# Altium PCB VINYL-Player.PcbDoc
Units mm, origin at the board's own origin, x right, y up, seen from the top; angles counter-clockwise.
Board outline 152.4 x 101.6 mm, 18 copper layers (F.Cu, F.Mask, B.Cu, B.Mask, F.SilkS, B.SilkS, F.Adhes, B.Adhes, F.Paste, B.Paste, Dwgs.User, Cmts.User, Eco1.User, Eco2.User, Edge.Cuts, Margin, B.CrtYd, F.CrtYd); 26 components, 0 nets, 136 pads, 10 vias.
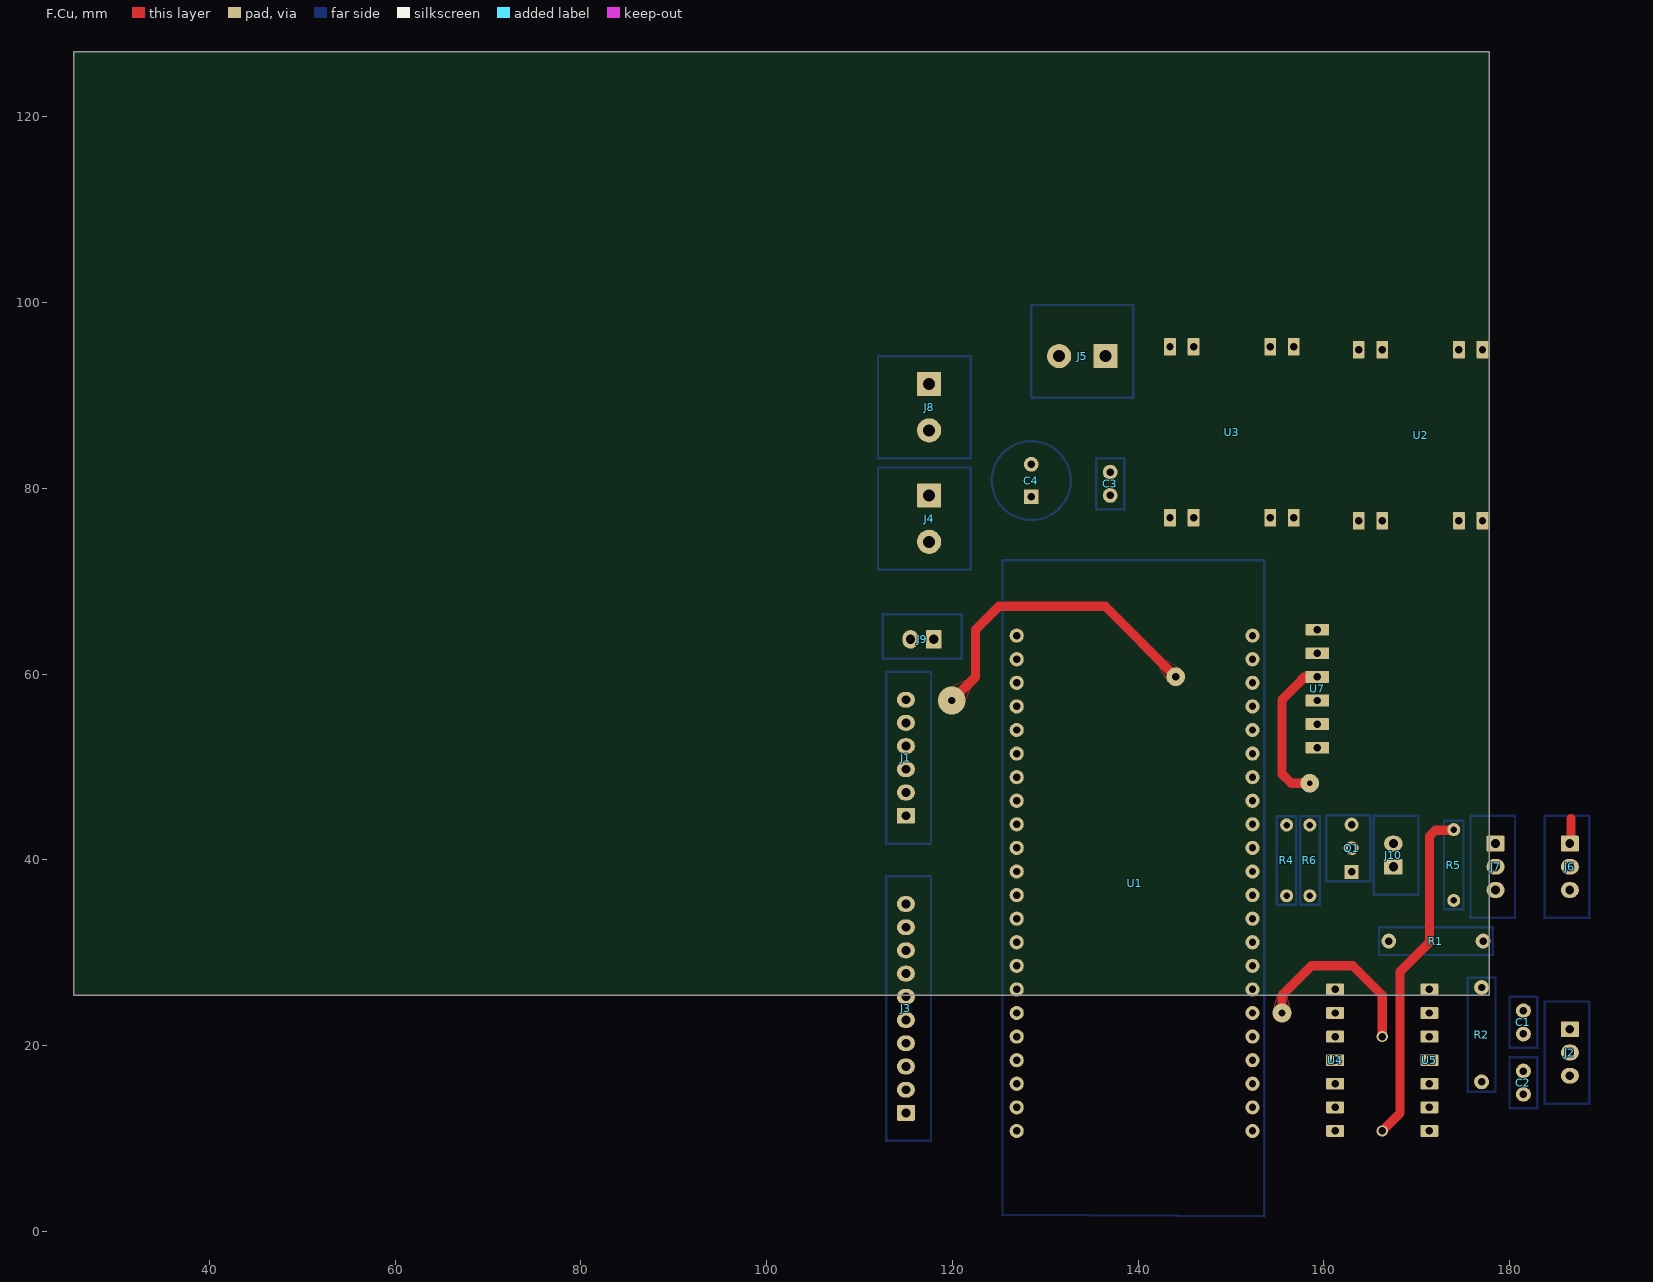
[diagram p0: F.Cu view]
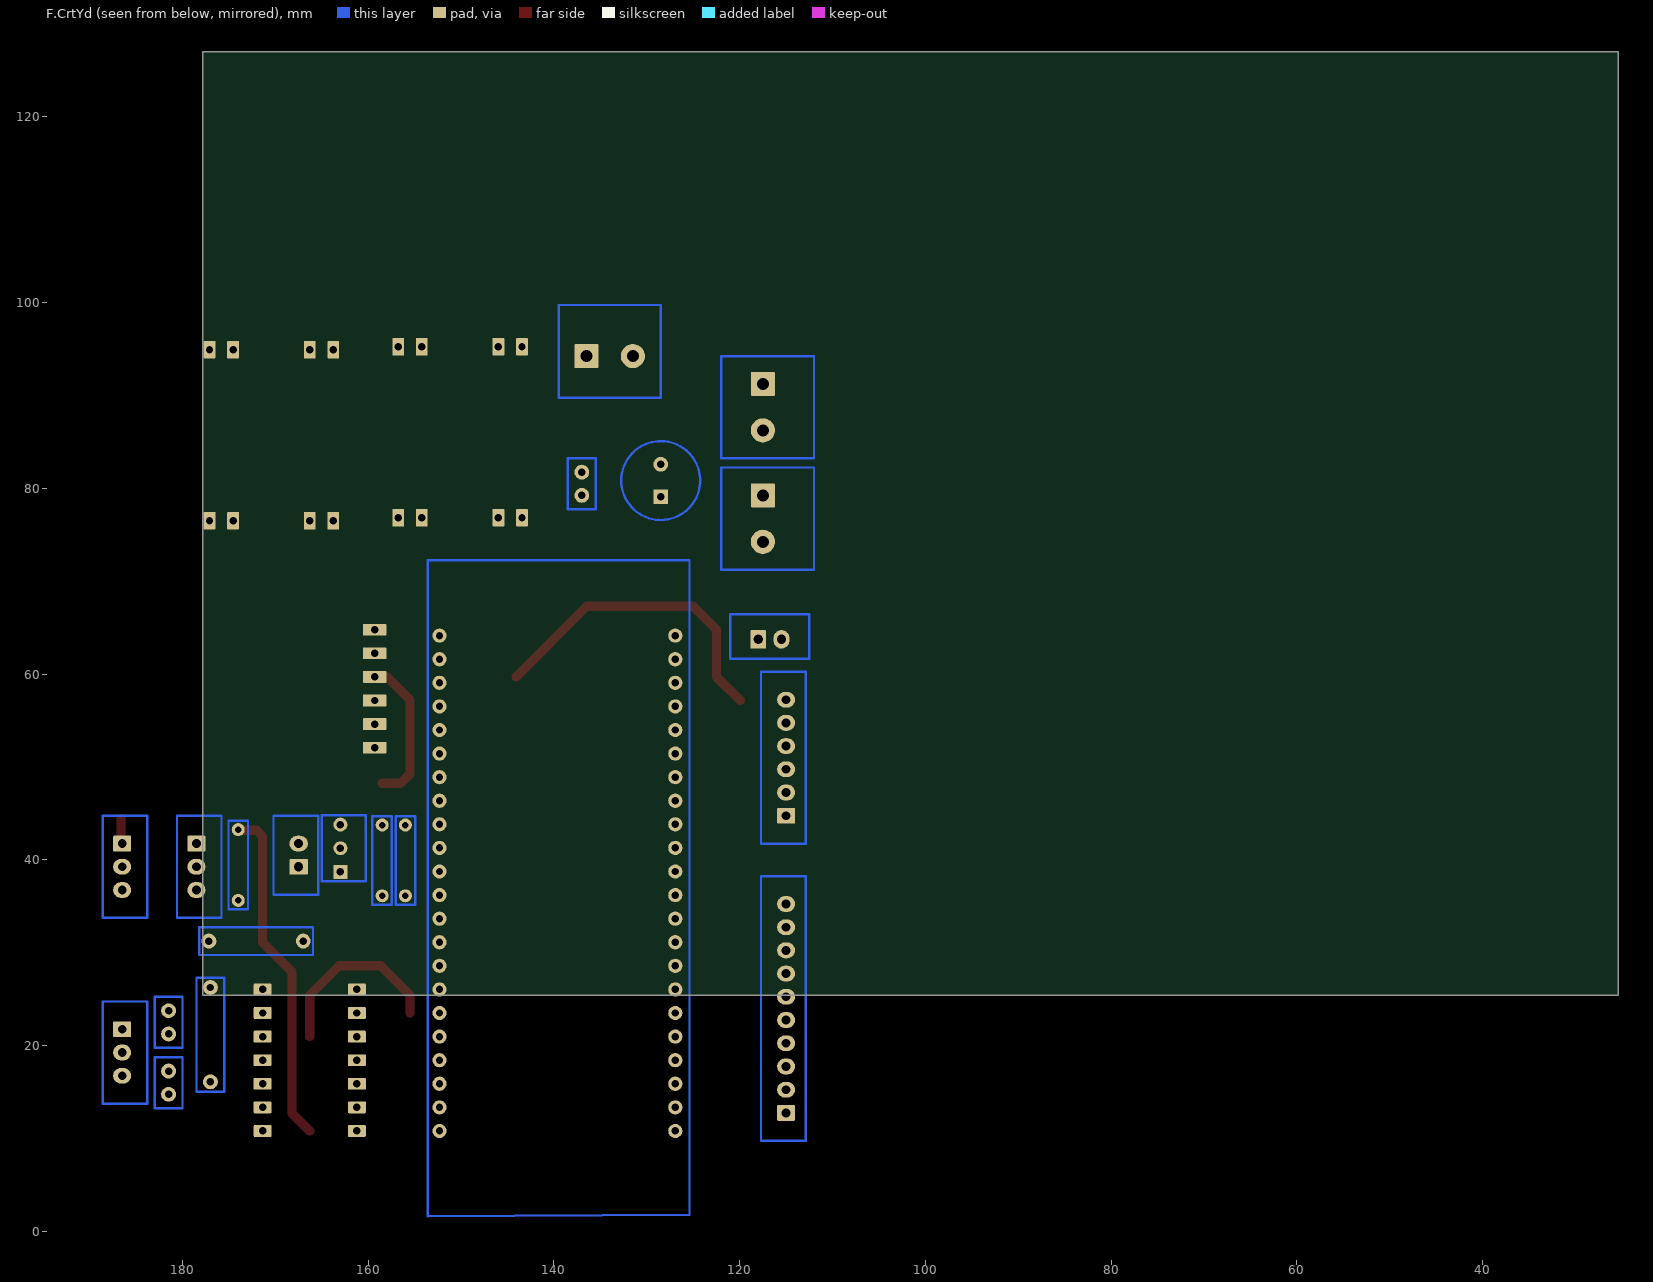
[diagram p1: F.CrtYd view, seen from below]
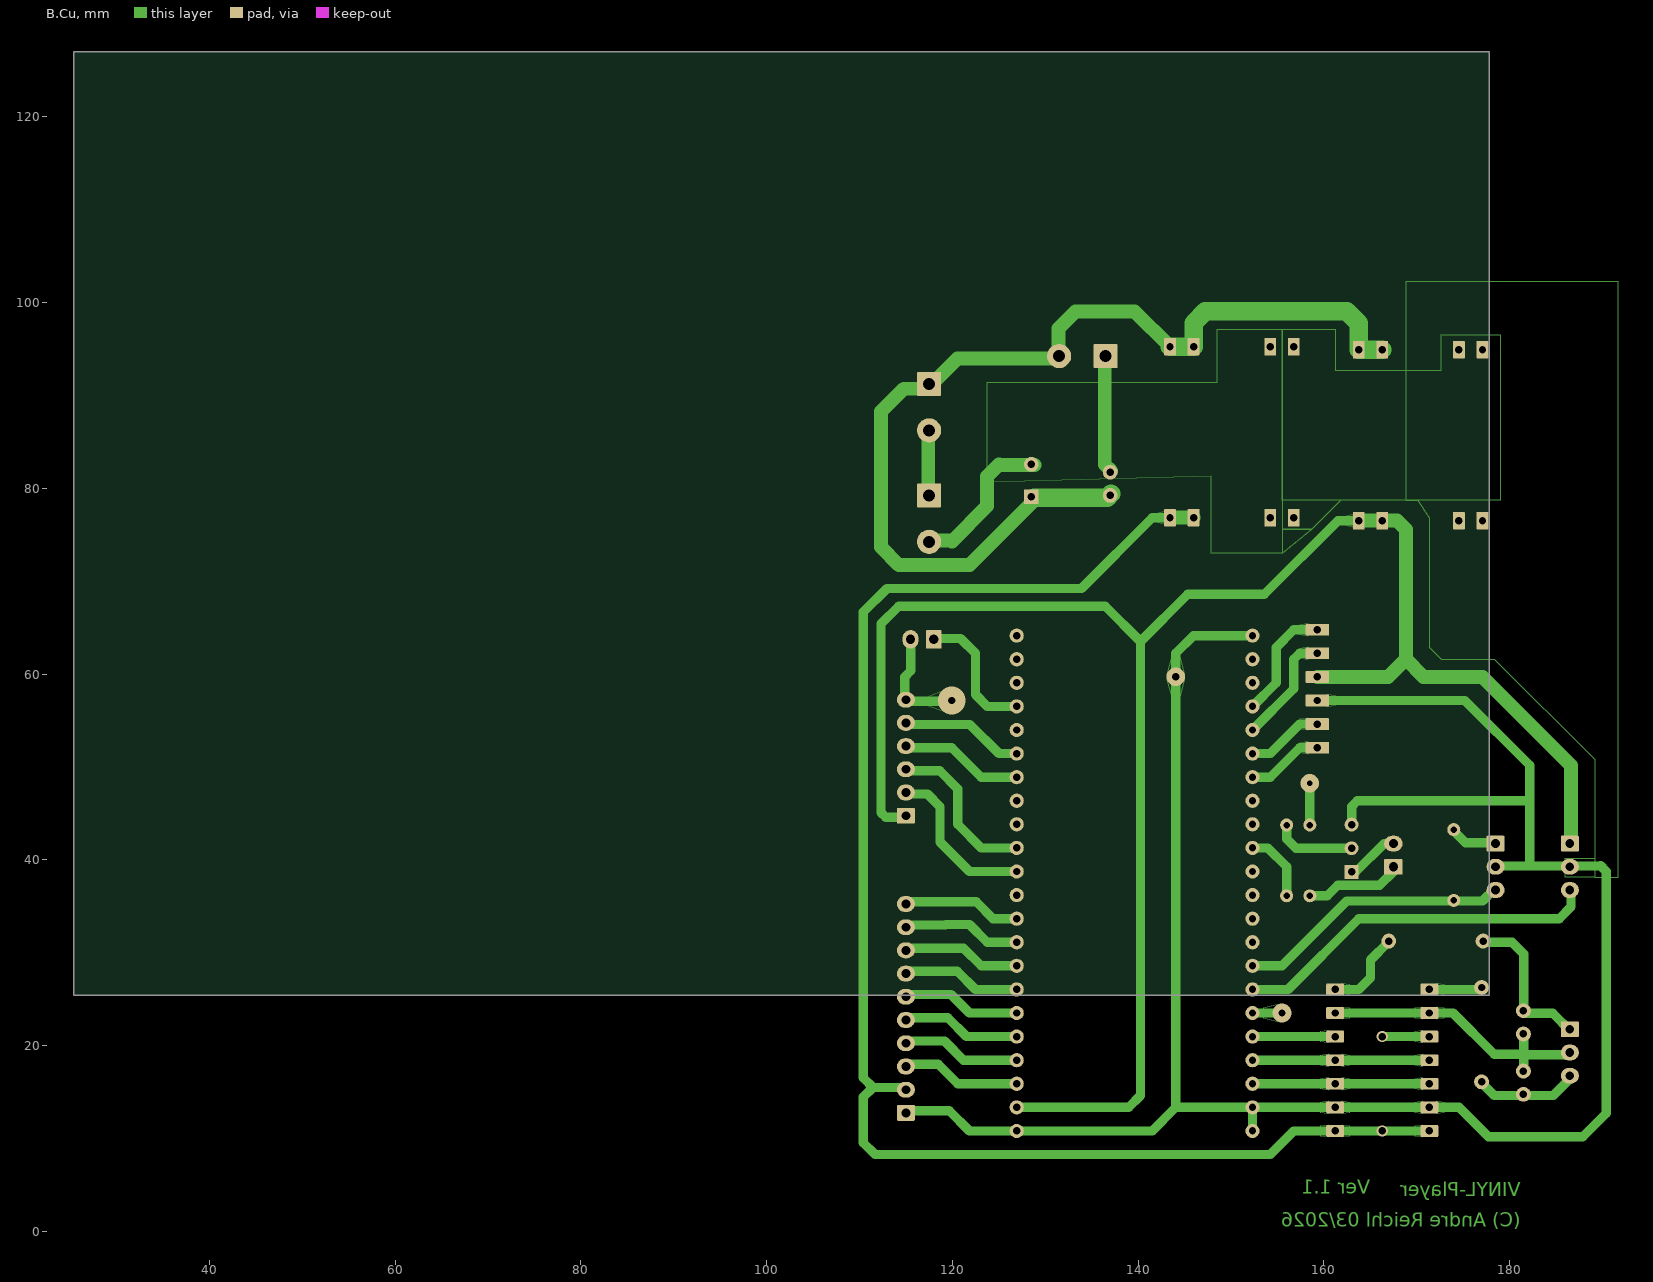
[diagram p2: B.Cu]
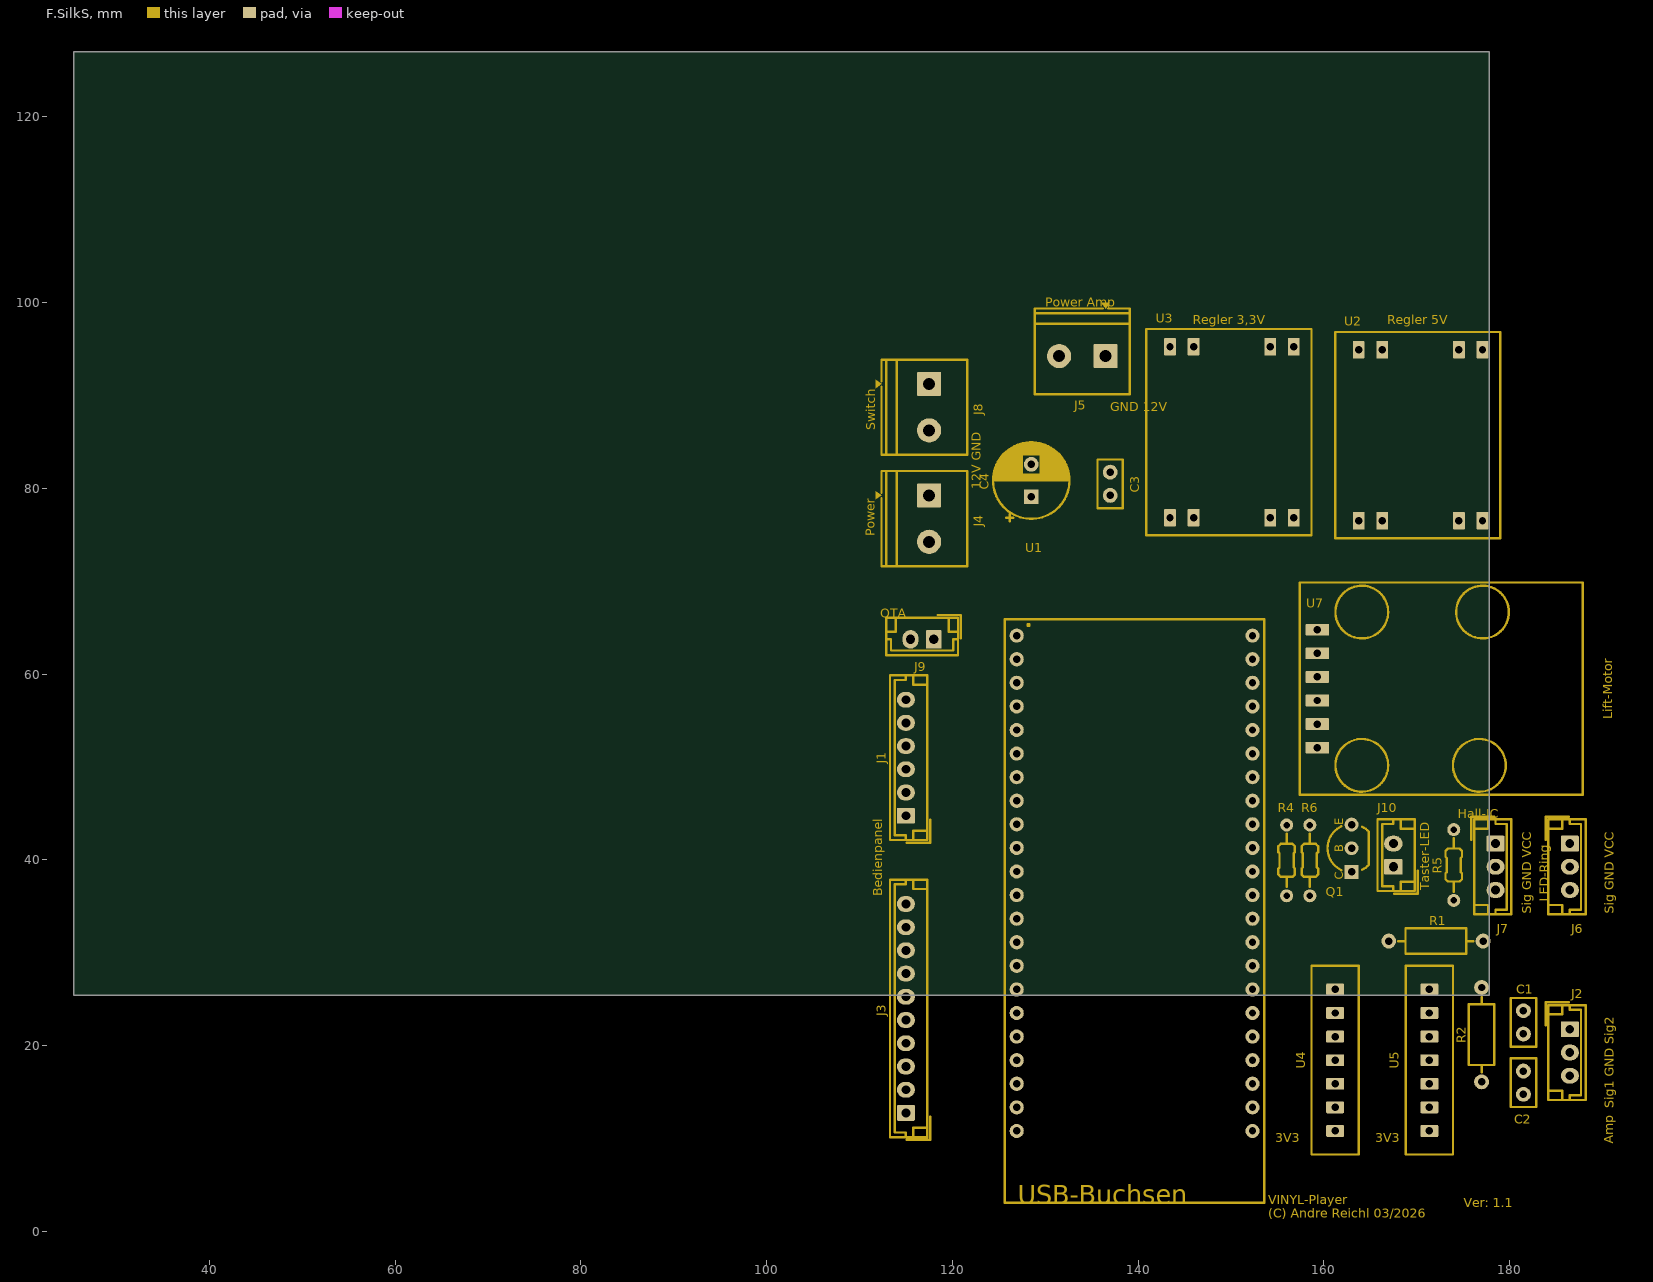
[diagram p3: F.SilkS]
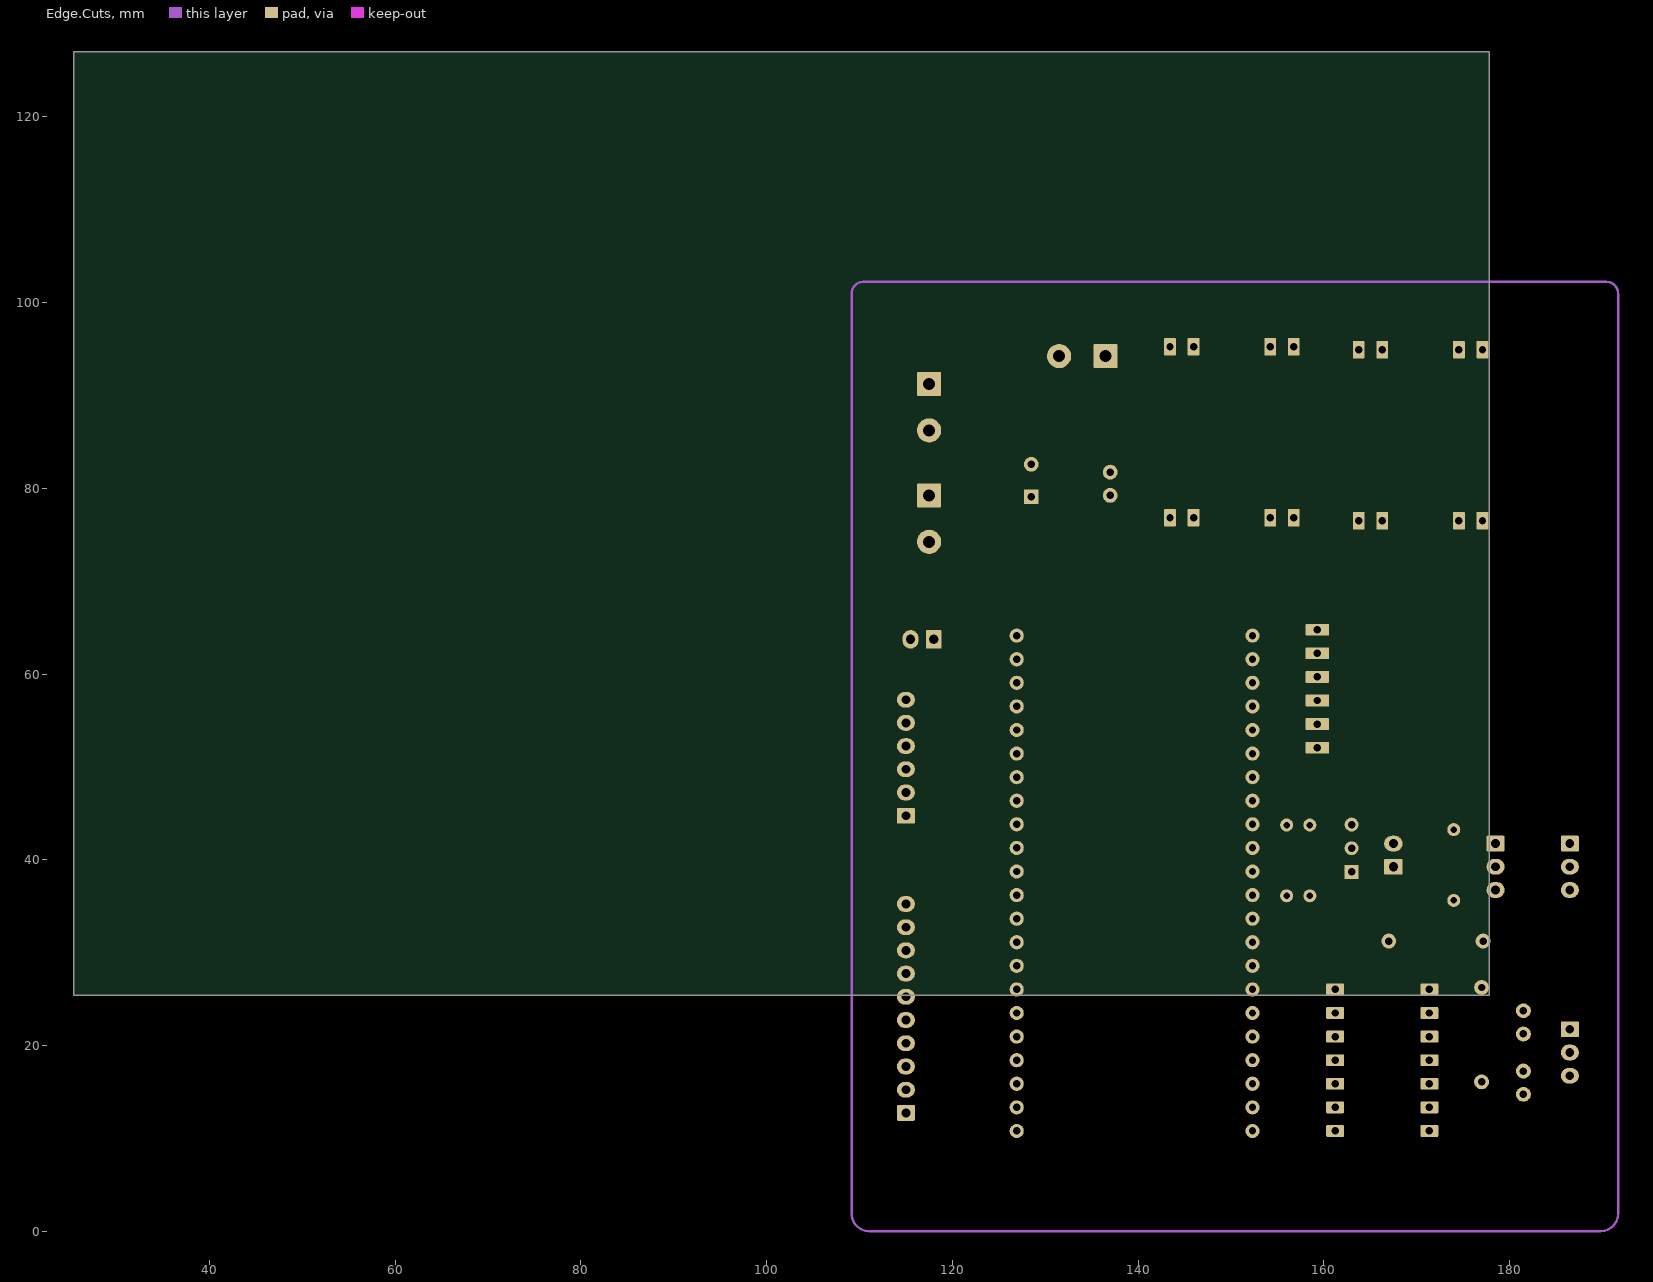
[diagram p4: Edge.Cuts]

## Layer stack, top to bottom
Top Solder: solder mask 0.0102, Solder Resist, Dk 3.5
F.Cu: signal copper 0.0356
Dielectric 1: dielectric 0.32, FR-4, Dk 4.8
F.Mask: signal copper 0.0356
Dielectric2: dielectric 0.32, FR-4, Dk 4.8
B.Cu: signal copper 0.0356
Dielectric3: dielectric 0.32, FR-4, Dk 4.8
B.Mask: signal copper 0.0356
Dielectric4: dielectric 0.32, FR-4, Dk 4.8
F.SilkS: signal copper 0.0356
Dielectric5: dielectric 0.32, FR-4, Dk 4.8
B.SilkS: signal copper 0.0356
Dielectric6: dielectric 0.32, FR-4, Dk 4.8
F.Adhes: signal copper 0.0356
Dielectric7: dielectric 0.32, FR-4, Dk 4.8
B.Adhes: signal copper 0.0356
Dielectric8: dielectric 0.32, FR-4, Dk 4.8
F.Paste: signal copper 0.0356
Dielectric9: dielectric 0.32, FR-4, Dk 4.8
B.Paste: signal copper 0.0356
Dielectric10: dielectric 0.32, FR-4, Dk 4.8
Dwgs.User: signal copper 0.0356
Dielectric11: dielectric 0.32, FR-4, Dk 4.8
Cmts.User: signal copper 0.0356
Dielectric12: dielectric 0.32, FR-4, Dk 4.8
Eco1.User: signal copper 0.0356
Dielectric13: dielectric 0.32, FR-4, Dk 4.8
Eco2.User: signal copper 0.0356
Dielectric14: dielectric 0.32, FR-4, Dk 4.8
Edge.Cuts: signal copper 0.0356
Dielectric15: dielectric 0.32, FR-4, Dk 4.8
Margin: signal copper 0.0356
Dielectric16: dielectric 0.32, FR-4, Dk 4.8
B.CrtYd: signal copper 0.0356
Dielectric17: dielectric 0.32, FR-4, Dk 4.8
F.CrtYd: signal copper 0.0356
Bottom Solder: solder mask 0.0102, Solder Resist, Dk 3.5

## Board outline
25.4,25.4 177.8,25.4 177.8,127 25.4,127

## Design rules (kind name [scope] priority, off if disabled: settings)
Clearance "Clearence 0,2_NetClass" [InNetClass('Default')] p1: gap=0.2 ignorepadtopadclearanceinfootprint=FALSE
Clearance "Clearence 0,1_Polygon" [InNamedPolygon('B.Cu--4') OR InNamedPolygon('B.Cu--5') OR InNamedPolygon('B.Cu--12') OR InNamedPolygon('B.Cu--20') OR InNamedPolygon('B.Cu--30') OR InNamedPolygon('B.Cu--32')] p2: gap=0.1 ignorepadtopadclearanceinfootprint=FALSE
MinimumSolderMaskSliver [All] p1: minsoldermaskwidth=0
PolygonConnect Polygon_B.Cu--36_ConnectDirect [IsNamedPolygon('B.Cu--36')] p1: connectstyle=Direct reliefconductorwidth=0.254 reliefentries=4 polygonreliefangle="90 Angle" airgapwidth=0.254
PolygonConnect Polygon_B.Cu--35_ConnectDirect [IsNamedPolygon('B.Cu--35')] p2: connectstyle=Direct reliefconductorwidth=0.254 reliefentries=4 polygonreliefangle="90 Angle" airgapwidth=0.254
PolygonConnect Polygon_B.Cu--34_ConnectDirect [IsNamedPolygon('B.Cu--34')] p3: connectstyle=Direct reliefconductorwidth=0.254 reliefentries=4 polygonreliefangle="90 Angle" airgapwidth=0.254
PolygonConnect Polygon_B.Cu--33_ConnectDirect [IsNamedPolygon('B.Cu--33')] p4: connectstyle=Direct reliefconductorwidth=0.254 reliefentries=4 polygonreliefangle="90 Angle" airgapwidth=0.254
PolygonConnect Polygon_B.Cu--32_ConnectDirect [IsNamedPolygon('B.Cu--32') vs IsVia] p5: connectstyle=Direct reliefconductorwidth=0.254 reliefentries=4 polygonreliefangle="90 Angle" airgapwidth=0.254
PolygonConnect Polygon_B.Cu--32_ConnectRelief45 [IsNamedPolygon('B.Cu--32') vs (IsThruPin or IsSMTPin) and (PadShape_AllLayers = 'Round')] p6: connectstyle=Relief reliefconductorwidth=0.5 reliefentries=4 polygonreliefangle="45 Angle" airgapwidth=0.5
PolygonConnect Polygon_B.Cu--32_ConnectRelief90 [IsNamedPolygon('B.Cu--32') vs (IsThruPin or IsSMTPin) and (PadShape_AllLayers <> 'Round')] p7: connectstyle=Relief reliefconductorwidth=0.5 reliefentries=4 polygonreliefangle="90 Angle" airgapwidth=0.5
PolygonConnect Polygon_B.Cu--31_ConnectDirect [IsNamedPolygon('B.Cu--31')] p8: connectstyle=Direct reliefconductorwidth=0.254 reliefentries=4 polygonreliefangle="90 Angle" airgapwidth=0.254
PolygonConnect Polygon_B.Cu--30_ConnectDirect [IsNamedPolygon('B.Cu--30') vs IsVia] p9: connectstyle=Direct reliefconductorwidth=0.254 reliefentries=4 polygonreliefangle="90 Angle" airgapwidth=0.254
PolygonConnect Polygon_B.Cu--30_ConnectRelief45 [IsNamedPolygon('B.Cu--30') vs (IsThruPin or IsSMTPin) and (PadShape_AllLayers = 'Round')] p10: connectstyle=Relief reliefconductorwidth=0.5 reliefentries=4 polygonreliefangle="45 Angle" airgapwidth=0.5
PolygonConnect Polygon_B.Cu--30_ConnectRelief90 [IsNamedPolygon('B.Cu--30') vs (IsThruPin or IsSMTPin) and (PadShape_AllLayers <> 'Round')] p11: connectstyle=Relief reliefconductorwidth=0.5 reliefentries=4 polygonreliefangle="90 Angle" airgapwidth=0.5
PolygonConnect Polygon_B.Cu--29_ConnectDirect [IsNamedPolygon('B.Cu--29')] p12: connectstyle=Direct reliefconductorwidth=0.254 reliefentries=4 polygonreliefangle="90 Angle" airgapwidth=0.254
PolygonConnect Polygon_B.Cu--28_ConnectDirect [IsNamedPolygon('B.Cu--28')] p13: connectstyle=Direct reliefconductorwidth=0.254 reliefentries=4 polygonreliefangle="90 Angle" airgapwidth=0.254
PolygonConnect Polygon_B.Cu--27_ConnectDirect [IsNamedPolygon('B.Cu--27')] p14: connectstyle=Direct reliefconductorwidth=0.254 reliefentries=4 polygonreliefangle="90 Angle" airgapwidth=0.254
PolygonConnect Polygon_B.Cu--26_ConnectDirect [IsNamedPolygon('B.Cu--26')] p15: connectstyle=Direct reliefconductorwidth=0.254 reliefentries=4 polygonreliefangle="90 Angle" airgapwidth=0.254
PolygonConnect Polygon_B.Cu--25_ConnectDirect [IsNamedPolygon('B.Cu--25')] p16: connectstyle=Direct reliefconductorwidth=0.254 reliefentries=4 polygonreliefangle="90 Angle" airgapwidth=0.254
PolygonConnect Polygon_B.Cu--24_ConnectDirect [IsNamedPolygon('B.Cu--24')] p17: connectstyle=Direct reliefconductorwidth=0.254 reliefentries=4 polygonreliefangle="90 Angle" airgapwidth=0.254
PolygonConnect Polygon_B.Cu--23_ConnectDirect [IsNamedPolygon('B.Cu--23')] p18: connectstyle=Direct reliefconductorwidth=0.254 reliefentries=4 polygonreliefangle="90 Angle" airgapwidth=0.254
PolygonConnect Polygon_B.Cu--22_ConnectDirect [IsNamedPolygon('B.Cu--22')] p19: connectstyle=Direct reliefconductorwidth=0.254 reliefentries=4 polygonreliefangle="90 Angle" airgapwidth=0.254
PolygonConnect Polygon_B.Cu--21_ConnectDirect [IsNamedPolygon('B.Cu--21')] p20: connectstyle=Direct reliefconductorwidth=0.254 reliefentries=4 polygonreliefangle="90 Angle" airgapwidth=0.254
PolygonConnect Polygon_B.Cu--20_ConnectDirect [IsNamedPolygon('B.Cu--20') vs IsVia] p21: connectstyle=Direct reliefconductorwidth=0.254 reliefentries=4 polygonreliefangle="90 Angle" airgapwidth=0.254
PolygonConnect Polygon_B.Cu--20_ConnectRelief45 [IsNamedPolygon('B.Cu--20') vs (IsThruPin or IsSMTPin) and (PadShape_AllLayers = 'Round')] p22: connectstyle=Relief reliefconductorwidth=0.5 reliefentries=4 polygonreliefangle="45 Angle" airgapwidth=0.5
PolygonConnect Polygon_B.Cu--20_ConnectRelief90 [IsNamedPolygon('B.Cu--20') vs (IsThruPin or IsSMTPin) and (PadShape_AllLayers <> 'Round')] p23: connectstyle=Relief reliefconductorwidth=0.5 reliefentries=4 polygonreliefangle="90 Angle" airgapwidth=0.5
PolygonConnect Polygon_B.Cu--19_ConnectDirect [IsNamedPolygon('B.Cu--19')] p24: connectstyle=Direct reliefconductorwidth=0.254 reliefentries=4 polygonreliefangle="90 Angle" airgapwidth=0.254
PolygonConnect Polygon_B.Cu--18_ConnectDirect [IsNamedPolygon('B.Cu--18')] p25: connectstyle=Direct reliefconductorwidth=0.254 reliefentries=4 polygonreliefangle="90 Angle" airgapwidth=0.254
PolygonConnect Polygon_B.Cu--17_ConnectDirect [IsNamedPolygon('B.Cu--17')] p26: connectstyle=Direct reliefconductorwidth=0.254 reliefentries=4 polygonreliefangle="90 Angle" airgapwidth=0.254
PolygonConnect Polygon_B.Cu--16_ConnectDirect [IsNamedPolygon('B.Cu--16')] p27: connectstyle=Direct reliefconductorwidth=0.254 reliefentries=4 polygonreliefangle="90 Angle" airgapwidth=0.254
PolygonConnect Polygon_B.Cu--15_ConnectDirect [IsNamedPolygon('B.Cu--15')] p28: connectstyle=Direct reliefconductorwidth=0.254 reliefentries=4 polygonreliefangle="90 Angle" airgapwidth=0.254
PolygonConnect Polygon_B.Cu--14_ConnectDirect [IsNamedPolygon('B.Cu--14')] p29: connectstyle=Direct reliefconductorwidth=0.254 reliefentries=4 polygonreliefangle="90 Angle" airgapwidth=0.254
PolygonConnect Polygon_B.Cu--13_ConnectDirect [IsNamedPolygon('B.Cu--13')] p30: connectstyle=Direct reliefconductorwidth=0.254 reliefentries=4 polygonreliefangle="90 Angle" airgapwidth=0.254
PolygonConnect Polygon_B.Cu--12_ConnectDirect [IsNamedPolygon('B.Cu--12')] p31: connectstyle=Direct reliefconductorwidth=0.254 reliefentries=4 polygonreliefangle="90 Angle" airgapwidth=0.254
PolygonConnect Polygon_B.Cu--11_ConnectDirect [IsNamedPolygon('B.Cu--11')] p32: connectstyle=Direct reliefconductorwidth=0.254 reliefentries=4 polygonreliefangle="90 Angle" airgapwidth=0.254
PolygonConnect Polygon_B.Cu--10_ConnectDirect [IsNamedPolygon('B.Cu--10')] p33: connectstyle=Direct reliefconductorwidth=0.254 reliefentries=4 polygonreliefangle="90 Angle" airgapwidth=0.254
PolygonConnect Polygon_B.Cu--9_ConnectDirect [IsNamedPolygon('B.Cu--9')] p34: connectstyle=Direct reliefconductorwidth=0.254 reliefentries=4 polygonreliefangle="90 Angle" airgapwidth=0.254
PolygonConnect Polygon_B.Cu--8_ConnectDirect [IsNamedPolygon('B.Cu--8')] p35: connectstyle=Direct reliefconductorwidth=0.254 reliefentries=4 polygonreliefangle="90 Angle" airgapwidth=0.254
PolygonConnect Polygon_B.Cu--7_ConnectDirect [IsNamedPolygon('B.Cu--7')] p36: connectstyle=Direct reliefconductorwidth=0.254 reliefentries=4 polygonreliefangle="90 Angle" airgapwidth=0.254
PolygonConnect Polygon_B.Cu--6_ConnectDirect [IsNamedPolygon('B.Cu--6')] p37: connectstyle=Direct reliefconductorwidth=0.254 reliefentries=4 polygonreliefangle="90 Angle" airgapwidth=0.254
PolygonConnect Polygon_B.Cu--5_ConnectDirect [IsNamedPolygon('B.Cu--5')] p38: connectstyle=Direct reliefconductorwidth=0.254 reliefentries=4 polygonreliefangle="90 Angle" airgapwidth=0.254
PolygonConnect Polygon_B.Cu--4_ConnectDirect [IsNamedPolygon('B.Cu--4') vs IsVia] p39: connectstyle=Direct reliefconductorwidth=0.254 reliefentries=4 polygonreliefangle="90 Angle" airgapwidth=0.254
PolygonConnect Polygon_B.Cu--4_ConnectRelief45 [IsNamedPolygon('B.Cu--4') vs (IsThruPin or IsSMTPin) and (PadShape_AllLayers = 'Round')] p40: connectstyle=Relief reliefconductorwidth=0.5 reliefentries=4 polygonreliefangle="45 Angle" airgapwidth=0.5
PolygonConnect Polygon_B.Cu--4_ConnectRelief90 [IsNamedPolygon('B.Cu--4') vs (IsThruPin or IsSMTPin) and (PadShape_AllLayers <> 'Round')] p41: connectstyle=Relief reliefconductorwidth=0.5 reliefentries=4 polygonreliefangle="90 Angle" airgapwidth=0.5
PolygonConnect Polygon_B.Cu--3_ConnectDirect [IsNamedPolygon('B.Cu--3')] p42: connectstyle=Direct reliefconductorwidth=0.254 reliefentries=4 polygonreliefangle="90 Angle" airgapwidth=0.254
PolygonConnect Polygon_B.Cu--2_ConnectDirect [IsNamedPolygon('B.Cu--2')] p43: connectstyle=Direct reliefconductorwidth=0.254 reliefentries=4 polygonreliefangle="90 Angle" airgapwidth=0.254
PolygonConnect Polygon_B.Cu--1_ConnectDirect [IsNamedPolygon('B.Cu--1')] p44: connectstyle=Direct reliefconductorwidth=0.254 reliefentries=4 polygonreliefangle="90 Angle" airgapwidth=0.254
PolygonConnect Polygon_B.Cu-_ConnectDirect [IsNamedPolygon('B.Cu-')] p45: connectstyle=Direct reliefconductorwidth=0.254 reliefentries=4 polygonreliefangle="90 Angle" airgapwidth=0.254
PolygonConnect Polygon_F.Cu--3_ConnectDirect [IsNamedPolygon('F.Cu--3')] p46: connectstyle=Direct reliefconductorwidth=0.254 reliefentries=4 polygonreliefangle="90 Angle" airgapwidth=0.254
PolygonConnect Polygon_F.Cu--2_ConnectDirect [IsNamedPolygon('F.Cu--2')] p47: connectstyle=Direct reliefconductorwidth=0.254 reliefentries=4 polygonreliefangle="90 Angle" airgapwidth=0.254
PolygonConnect Polygon_F.Cu--1_ConnectDirect [IsNamedPolygon('F.Cu--1')] p48: connectstyle=Direct reliefconductorwidth=0.254 reliefentries=4 polygonreliefangle="90 Angle" airgapwidth=0.254
PolygonConnect Polygon_F.Cu-_ConnectDirect [IsNamedPolygon('F.Cu-')] p49: connectstyle=Direct reliefconductorwidth=0.254 reliefentries=4 polygonreliefangle="90 Angle" airgapwidth=0.254
RoutingVias [All] p1: holewidth=0.711 width=1.27 viastyle="Through Hole" minholewidth=0.711 minwidth=1.27 maxholewidth=0.711 maxwidth=1.27
SilkToSilkClearance [All] p1: silktosilkclearance=0
SilkToSolderMaskClearance [IsPad] p1: minsilkscreentomaskgap=0 clearancetoexposedcopper=TRUE
SolderMaskExpansion [All] p1: expansion=0 istentingtop=FALSE
Width [All] p1: maxlimit=10 minlimit=0.254 preferedwidth=0.254 toplayer_prefwidth=0.2 midlayer1_maxwidth=0.254 midlayer2_prefwidth=0.2 midlayer3_maxwidth=0.254 midlayer5_prefwidth=0.2 midlayer7_maxwidth=0.254 midlayer9_maxwidth=0.254 midlayer11_maxwidth=0.254 midlayer13_maxwidth=0.254 midlayer15_maxwidth=0.254 midlayer17_maxwidth=0.254 midlayer19_maxwidth=0.254 midlayer21_maxwidth=0.254 midlayer23_maxwidth=0.254 midlayer25_prefwidth=0.2 midlayer27_maxwidth=0.254 midlayer29_maxwidth=0.254 bottomlayer_prefwidth=0.2 minimp=50.000000 maximp=50.000000 favimp=50.000000
27 further rules are at their usual default settings.

## Components (designator, comment, footprint, x,y, rotation, side; value= is the part's Value field where it differs from the comment)
C1 "Comment" C_Disc_D5.0mm_W2.5mm_P2.50mm 181.5,21.24 r90 top value=100nF
C2 "Comment" C_Disc_D5.0mm_W2.5mm_P2.50mm 181.5,17.24 r270 top value=100nF
C3 "Comment" C_Disc_D5.0mm_W2.5mm_P2.50mm 137,81.74 r270 top value=100nF
C4 "Comment" CP_Radial_D8.0mm_P3.50mm 128.5,79.087 r90 top value=470uF_16V
J1 "Comment" JST_EH_B6B-EH-A_1x06_P2.50mm_Vertical 115,44.74 r90 top value=JST_06
J2 "Comment" JST_EH_B3B-EH-A_1x03_P2.50mm_Vertical 186.5,21.74 r270 top value=JST_03
J3 "Comment" JST_EH_B10B-EH-A_1x10_P2.50mm_Vertical 115,12.74 r90 top value=JST_10
J4 "Comment" TerminalBlock_Phoenix_PT-1,5-2-5.0-H_1x02_P5.00mm_Horizontal 117.5,79.24 r270 top value=Screw_Terminal_2_P5.00mm
J5 "Comment" TerminalBlock_Phoenix_PT-1,5-2-5.0-H_1x02_P5.00mm_Horizontal 136.5,94.24 r180 top value=Screw_Terminal_2_P5.00mm
J6 "Comment" JST_EH_B3B-EH-A_1x03_P2.50mm_Vertical 186.5,41.74 r270 top value=JST_03
J7 "Comment" JST_EH_B3B-EH-A_1x03_P2.50mm_Vertical 178.5,41.74 r270 top value=JST_03
J8 "Comment" TerminalBlock_Phoenix_PT-1,5-2-5.0-H_1x02_P5.00mm_Horizontal 117.5,91.24 r270 top value=Screw_Terminal_2_P5.00mm
J9 "Comment" JST_EH_B2B-EH-A_1x02_P2.50mm_Vertical 118,63.74 r180 top value=JST_02
J10 "Comment" JST_EH_B2B-EH-A_1x02_P2.50mm_Vertical 167.5,39.24 r90 top value=JST_02
Q1 "Comment" TO-92_Inline_Wide_CBE 163,38.7 r90 top value=BC547C
R1 "Comment" R_Axial_DIN0207_L6.3mm_D2.5mm_P10.16mm_Horizontal 167,31.24 r0 top value=4.7k
R2 "Comment" R_Axial_DIN0207_L6.3mm_D2.5mm_P10.16mm_Horizontal 177,16.08 r90 top value=4.7k
R4 "Comment" R_Axial_DIN0204_L3.6mm_D1.6mm_P7.62mm_Horizontal 156,36.12 r90 top value=1k
R5 "Comment" R_Axial_DIN0204_L3.6mm_D1.6mm_P7.62mm_Horizontal 174,35.62 r90 top value=1k
R6 "Comment" R_Axial_DIN0204_L3.6mm_D1.6mm_P7.62mm_Horizontal 158.5,43.74 r270 top value=1k
U1 "Comment" XCVR_ESP32-S3-DEVKITC-1-N8R2 138.36,34.165 r0 top value=ESP32-S3-DEVKITC-1-N8R2
U2 "Comment" MP1584-PowerDown-Modul 173.92,82.867 r0 top value=MP1584
U3 "Comment" MP1584-PowerDown-Modul 153.6,83.185 r0 top value=MP1584
U4 "Comment" AD9833-Modul-Hochkant 154.87,18.415 r90 top value=AD9833
U5 "Comment" AD9833-Modul-Hochkant 165.03,18.415 r90 top value=AD9833
U7 "Comment" L9110_Dual_Motor_Module 159.315,60.96 r0 top value=L9110_Dual_Motor_Module

## Footprints (in the part's own frame and the unit in brackets; to place one, negate y for a bottom-side part, rotate by r counter-clockwise, add the part's x,y. Pads: shape width x height; smd on the part's side, far side on the other; paste and mask are expansions set on the pad)
AD9833-Modul-Hochkant [mm]
  rrect15% 1.27x1.905 hole 0.8 paste-2539.97 mask-1.905: 1(-7.62,-6.35) 2(-5.08,-6.35) 3(-2.54,-6.35) 4(0,-6.35) 5(2.54,-6.35) 6(5.08,-6.35) 7(7.62,-6.35)
  F.SilkS lines w0.254: -10.16,-3.81 -10.16,-8.89 10.16,-8.89 10.16,-3.81 -10.16,-3.81
C_Disc_D5.0mm_W2.5mm_P2.50mm [mm]
  round 1.6 hole 0.8 paste-2539.97 mask-1.6: 1(0,0) 2(2.5,0)
  F.SilkS lines w0.254: -1.37,1.37 3.87,1.37 3.87,-1.37 -1.37,-1.37 -1.37,1.37
  F.CrtYd lines w0.254: -1.5,1.5 -1.5,-1.5 4,-1.5 4,1.5 -1.5,1.5
CP_Radial_D8.0mm_P3.50mm [mm]
  rrect16% 1.6x1.6 hole 0.8 paste-2539.97 mask-1.6: 1(0,0)
  round 1.6 hole 0.8 paste-2539.97 mask-1.6: 2(3.5,0)
  F.SilkS circle w0.254: c1.75,0 r4.12
  F.SilkS lines w0.254: -2.26,2.715 -2.26,1.915 ; -2.66,2.315 -1.86,2.315 ; 5.55,1.552 5.55,-1.552 ; 5.59,1.453 5.59,-1.453 ; 5.63,1.346 5.63,-1.346 ; 5.67,1.228 5.67,-1.228 ; 5.71,1.097 5.71,-1.097 ; 5.75,0.947 5.75,-0.947 ; 5.79,0.768 5.79,-0.768 ; 5.83,0.533 5.83,-0.533 ; 2.47,-1.04 2.47,-4.017 ; 5.51,-1.644 5.47,1.731 5.43,-1.813 5.39,1.89 5.35,-1.964 5.31,2.034 5.27,-2.101 5.23,2.165 5.19,-2.227 5.15,2.287 5.11,-2.344 5.07,2.4 5.03,-2.453 4.99,2.505 4.95,-2.555 4.91,2.604 4.87,-2.651 4.83,2.696 4.79,-2.741 4.75,2.784 4.71,-2.826 4.67,2.867 4.63,-2.906 4.59,2.945 4.55,-2.982 4.51,3.019 4.47,1.04 4.43,3.089 4.39,1.04 4.35,3.156 4.31,1.04 4.27,3.219 4.23,1.04 4.19,3.28 4.15,1.04 4.11,3.337 4.07,1.04 4.03,3.392 3.99,1.04 3.95,3.443 3.91,1.04 3.87,3.493 3.83,1.04 3.79,3.539 3.75,1.04 3.71,3.584 3.67,1.04 3.63,3.626 3.59,1.04 3.55,3.666 3.51,1.04 3.47,3.704 3.43,1.04 3.39,3.74 3.35,1.04 3.31,3.773 3.27,1.04 3.23,3.805 3.19,1.04 3.15,3.835 3.11,1.04 3.07,3.863 3.03,1.04 2.99,3.889 2.95,1.04 2.91,3.913 2.87,1.04 2.83,3.936 2.79,1.04 2.75,3.957 2.71,1.04 2.67,3.976 2.63,1.04 2.59,3.993 2.55,1.04 2.47,4.017 ; 1.79,4.08 1.83,-4.079 ; 1.79,4.08 1.79,-4.08 1.79,4.08 ; 1.79,4.08 1.83,-4.079 ; 2.47,4.017 2.47,1.04 2.47,4.017 ; 4.51,-1.04 4.43,-3.089 4.39,-1.04 4.35,-3.156 4.31,-1.04 4.27,-3.219 4.23,-1.04 4.19,-3.28 4.15,-1.04 4.11,-3.337 4.07,-1.04 4.03,-3.392 3.99,-1.04 3.95,-3.443 3.91,-1.04 3.87,-3.493 3.83,-1.04 3.79,-3.539 3.75,-1.04 3.71,-3.584 3.67,-1.04 3.63,-3.626 3.59,-1.04 3.55,-3.666 3.51,-1.04 3.47,-3.704 3.43,-1.04 3.39,-3.74 3.35,-1.04 3.31,-3.773 3.27,-1.04 3.23,-3.805 3.19,-1.04 3.15,-3.835 3.11,-1.04 3.07,-3.863 3.03,-1.04 2.99,-3.889 2.95,-1.04 2.91,-3.913 2.87,-1.04 2.83,-3.936 2.79,-1.04 2.75,-3.957 2.71,-1.04 2.67,-3.976 2.63,-1.04 2.59,-3.993 2.55,-1.04 2.43,-4.023 2.39,4.03 2.35,-4.036 2.31,4.042 2.27,-4.047 2.23,4.052 2.19,-4.056 2.15,4.061 2.11,-4.064 2.07,4.068 2.03,-4.07 1.99,4.073 1.95,-4.075 1.91,4.077 1.83,-4.079 ; 4.51,-1.04 4.51,-3.019 4.51,-1.04
  F.CrtYd circle w0.254: c1.75,0 r4.25
JST_EH_B2B-EH-A_1x02_P2.50mm_Vertical [mm]
  rrect15% 1.7x2 hole 1 paste-2539.97 mask-2: 1(0,0)
  rrect100% 1.7x2 hole 1 paste-2539.97 mask-2: 2(2.5,0)
  F.SilkS lines w0.254: 5.11,0 4.61,0 4.61,1.21 -2.11,1.21 -2.11,0 -2.61,0 ; 5.11,-0.81 4.11,-0.81 4.11,-2.31 ; -0.41,-2.61 -2.91,-2.61 -2.91,-0.11 ; -1.61,-2.31 -1.61,-0.81 -2.61,-0.81 ; 5.11,1.71 5.11,-2.31 -2.61,-2.31 -2.61,1.71 5.11,1.71
  F.CrtYd lines w0.254: 5.5,2.1 5.5,-2.7 -3,-2.7 -3,2.1 5.5,2.1
JST_EH_B3B-EH-A_1x03_P2.50mm_Vertical [mm]
  rrect15% 1.7x1.95 hole 0.95 paste-2539.97 mask-1.95: 1(0,0)
  rrect100% 1.7x1.95 hole 0.95 paste-2539.97 mask-1.95: 2(2.5,0) 3(5,0)
  F.SilkS lines w0.254: -0.41,-2.61 -2.91,-2.61 -2.91,-0.11 ; 6.61,-2.31 6.61,-0.81 7.61,-0.81 ; -1.61,-2.31 -1.61,-0.81 -2.61,-0.81 ; 7.61,0 7.11,0 7.11,1.21 -2.11,1.21 -2.11,0 -2.61,0 ; 7.61,-2.31 -2.61,-2.31 -2.61,1.71 7.61,1.71 7.61,-2.31
  F.CrtYd lines w0.254: 8,-2.7 -3,-2.7 -3,2.1 8,2.1 8,-2.7
JST_EH_B6B-EH-A_1x06_P2.50mm_Vertical [mm]
  rrect15% 1.7x1.95 hole 0.95 paste-2539.97 mask-1.95: 1(0,0)
  rrect100% 1.7x1.95 hole 0.95 paste-2539.97 mask-1.95: 2(2.5,0) 3(5,0) 4(7.5,0) 5(10,0) 6(12.5,0)
  F.SilkS lines w0.254: -2.61,0 -2.11,0 -2.11,1.21 14.61,1.21 14.61,0 15.11,0 ; -2.91,-0.11 -2.91,-2.61 -0.41,-2.61 ; -2.61,-0.81 -1.61,-0.81 -1.61,-2.31 ; 15.11,-0.81 14.11,-0.81 14.11,-2.31 ; -2.61,1.71 -2.61,-2.31 15.11,-2.31 15.11,1.71 -2.61,1.71
  F.CrtYd lines w0.254: -3,2.1 -3,-2.7 15.5,-2.7 15.5,2.1 -3,2.1
JST_EH_B10B-EH-A_1x10_P2.50mm_Vertical [mm]
  rrect15% 1.7x1.95 hole 0.95 paste-2539.97 mask-1.95: 1(0,0)
  rrect100% 1.7x1.95 hole 0.95 paste-2539.97 mask-1.95: 2(2.5,0) 3(5,0) 4(7.5,0) 5(10,0) 6(12.5,0) 7(15,0) 8(17.5,0) 9(20,0) 10(22.5,0)
  F.SilkS lines w0.254: -2.61,0 -2.11,0 -2.11,1.21 24.61,1.21 24.61,0 25.11,0 ; -2.91,-0.11 -2.91,-2.61 -0.41,-2.61 ; -2.61,-0.81 -1.61,-0.81 -1.61,-2.31 ; 25.11,-0.81 24.11,-0.81 24.11,-2.31 ; -2.61,1.71 -2.61,-2.31 25.11,-2.31 25.11,1.71 -2.61,1.71
  F.CrtYd lines w0.254: -3,2.1 -3,-2.7 25.5,-2.7 25.5,2.1 -3,2.1
L9110_Dual_Motor_Module [mm]
  rrect15% 2.54x1.27 hole 0.8 paste-2539.97 mask-2.54: 1(0,3.81) 2(0,1.27) 3(0,-1.27) 4(0,-3.81) 5(0,-6.35) 6(0,-8.89)
  F.SilkS circle w0.254: c4.78,5.715 r2.84
  F.SilkS circle w0.254: c4.78,-10.795 r2.84
  F.SilkS circle w0.254: c17.445,-10.795 r2.84
  F.SilkS circle w0.254: c17.78,5.715 r2.84
  F.SilkS lines w0.254: -1.905,-13.97 -1.905,8.89 28.575,8.89 28.575,-13.97 -1.905,-13.97
MP1584-PowerDown-Modul [mm]
  rrect20% 1.27x1.905 hole 0.8 paste-2539.97 mask-1.905: 1(-10.16,12.065)
  rrect15% 1.27x1.905 hole 0.8 paste-2539.97 mask-1.905: 2(-7.62,12.065) 3(0.635,12.065) 4(3.175,12.065) 5(3.175,-6.35) 6(0.635,-6.35) 7(-7.62,-6.35) 8(-10.16,-6.35)
  F.SilkS lines w0.254: -12.7,-8.255 -12.7,13.97 5.08,13.97 5.08,-8.255 -12.7,-8.255
R_Axial_DIN0204_L3.6mm_D1.6mm_P7.62mm_Horizontal [mm]
  round 1.4 hole 0.7 paste-2539.97 mask-1.4: 1(0,0)
  rrect100% 1.4x1.4 hole 0.7 paste-2539.97 mask-1.4: 2(7.62,0)
  F.SilkS lines w0.254: 0.94,0 1.89,0 2.032,0 ; 5.588,0 5.73,0 6.68,0 ; 2.286,0.889 2.032,0.635 2.032,-0.635 2.286,-0.889 2.921,-0.889 3.048,-0.762 3.81,-0.762 4.572,-0.762 4.699,-0.889 5.334,-0.889 5.588,-0.635 5.588,0.635 5.334,0.889 4.699,0.889 4.572,0.762 3.81,0.762 3.048,0.762 2.921,0.889 2.286,0.889
  F.CrtYd lines w0.254: -0.95,1.05 8.57,1.05 8.57,-1.05 -0.95,-1.05 -0.95,1.05
R_Axial_DIN0207_L6.3mm_D2.5mm_P10.16mm_Horizontal [mm]
  round 1.6 hole 0.8 paste-2539.97 mask-1.6: 1(0,0) 2(10.16,0)
  F.SilkS lines w0.254: 1.04,0 1.81,0 ; 8.35,0 9.12,0 ; 1.81,-1.37 1.81,1.37 8.35,1.37 8.35,-1.37 1.81,-1.37
  F.CrtYd lines w0.254: -1.05,-1.5 -1.05,1.5 11.21,1.5 11.21,-1.5 -1.05,-1.5
TerminalBlock_Phoenix_PT-1,5-2-5.0-H_1x02_P5.00mm_Horizontal [mm]
  rrect10% 2.6x2.6 hole 1.3 paste-2539.97 mask-2.6: 1(0,0)
  round 2.6 hole 1.3 paste-2539.97 mask-2.6: 2(5,0)
  F.SilkS region: 0.44,-5.73 -0.44,-5.73 0,-5.12
  F.SilkS lines w0.254: 0.3,-5.12 7.62,-5.12 7.62,4.12 -2.62,4.12 -2.62,-5.12 -0.3,-5.12 ; 7.62,-4.6 -2.62,-4.6 ; 7.62,-3.5 -2.62,-3.5
  F.CrtYd lines w0.254: 8,-5.5 -3,-5.5 -3,4.5 8,4.5 8,-5.5
TO-92_Inline_Wide_CBE [mm]
  rect 1.5x1.5 hole 0.8 paste-2539.97 mask-1.5: 1(0,0)
  round 1.5 hole 0.8 paste-2539.97 mask-1.5: 2(2.54,0) 3(5.08,0)
  F.SilkS lines w0.254: 0.184,1.099 cw(c2.54,0) 2.54,2.6 cw(c2.54,0) 4.896,1.099 ; 0.216,-1.123 ccw(c2.54,0) 0.74,-1.85 4.34,-1.85 ccw(c2.54,0) 4.864,-1.123
  F.CrtYd lines w0.254: -1.01,2.73 -1.01,-2.01 6.09,-2.01 6.09,2.73 -1.01,2.73
XCVR_ESP32-S3-DEVKITC-1-N8R2 [mm]
  round 1.53 hole 0.8 paste-2539.97 mask-1.53: J1_1(-11.43,29.97) J1_2(-11.43,27.43) J1_3(-11.43,24.89) J1_4(-11.43,22.35) J1_5(-11.43,19.81) J1_6(-11.43,17.27) J1_7(-11.43,14.73) J1_8(-11.43,12.19) J1_9(-11.43,9.65) J1_10(-11.43,7.11) J1_11(-11.43,4.57) J1_12(-11.43,2.03) J1_13(-11.43,-0.51) J1_14(-11.43,-3.05) J1_15(-11.43,-5.59) J1_16(-11.43,-8.13) J1_17(-11.43,-10.67) J1_18(-11.43,-13.21) J1_19(-11.43,-15.75) J1_20(-11.43,-18.29) J1_21(-11.43,-20.83) J1_22(-11.43,-23.37) J3_1(13.97,29.97) J3_2(13.97,27.43) J3_3(13.97,24.89) J3_4(13.97,22.35) J3_5(13.97,19.81) J3_6(13.97,17.27) J3_7(13.97,14.73) J3_8(13.97,12.19) J3_9(13.97,9.65) J3_10(13.97,7.11) J3_11(13.97,4.57) J3_12(13.97,2.03) J3_13(13.97,-0.51) J3_14(13.97,-3.05) J3_15(13.97,-5.59) J3_16(13.97,-8.13) J3_17(13.97,-10.67) J3_18(13.97,-13.21) J3_19(13.97,-15.75) J3_20(13.97,-18.29) J3_21(13.97,-20.83) J3_22(13.97,-23.37)
  F.SilkS circle w0.254: c-10.16,31.115 r0.1
  F.SilkS lines w0.254: -12.7,-31.115 -12.7,31.75 15.24,31.75 15.24,-31.115 -12.7,-31.115
  F.CrtYd lines w0.254: 15.24,-32.56 -12.95,-32.385 -12.95,38.1 15.24,38.1 15.24,-32.385

## Part data
C1 C2 C3: library part C_Disc_D5.0mm_W2.5mm_P2.50mm, "C, Disc series, Radial, pin pitch=2.50mm, diameter*width=5*2.5mm^2, Capacitor, http://cdn-reichelt.de/documents/datenblatt/B300/DS_KERKO_TC.pdf", Description="100nF Ceramic Capacitor", KiLib_Generator=capacitor/THT/other
C4: library part CP_Radial_D8.0mm_P3.50mm, "CP, Radial series, Radial, pin pitch=3.50mm, diameter=8mm, height=12mm, Electrolytic Capacitor", Description="470uF, 16V Electrolytic Capacitor", KiLib_Generator=capacitor/THT/other, ki_fp_filters="Capacitor_THT:CP_Radial_D5.0mm_* Capacitor_THT:CP_Radial_D4.0mm_* Capacitor_THT:CP_Radial_D6.3mm_* Capacitor_THT:CP_Radial_D7.5mm_* Capacitor_THT:CP_Radial_D8.0mm_* Capacitor_THT:CP_Radial_D10.0mm_* Capacitor_THT:CP_Radial_D14.0mm_* Capacitor_THT:CP_Radial_D16.0mm_* Capacitor_THT:CP_Radial_D18.0mm_*"
J1: library part JST_EH_B6B-EH-A_1x06_P2.50mm_Vertical, "JST EH series connector, B6B-EH-A (http://www.jst-mfg.com/product/pdf/eng/eEH.pdf)", Description="JST Connector  6 pins", KiLib_Generator=connector/JST, ki_fp_filters=Connector_JST:JST_EH_S6B-EH_1x06_P2.50mm_Horizontal
J2 J6 J7: library part JST_EH_B3B-EH-A_1x03_P2.50mm_Vertical, "JST EH series connector, B3B-EH-A (http://www.jst-mfg.com/product/pdf/eng/eEH.pdf)", Description="JST Connector  3 pins", KiLib_Generator=connector/JST, ki_fp_filters=Connector_JST:JST_EH_S3B-EH_1x03_P2.50mm_Horizontal
J3: library part JST_EH_B10B-EH-A_1x10_P2.50mm_Vertical, "JST EH series connector, B10B-EH-A (http://www.jst-mfg.com/product/pdf/eng/eEH.pdf)", Description="JST Connector  10 pins", KiLib_Generator=connector/JST, ki_fp_filters=Connector_JST:JST_EH_S10B-EH_1x10_P2.50mm_Horizontal
J4 J5 J8: library part TerminalBlock_Phoenix_PT-1,5-2-5.0-H_1x02_P5.00mm_Horizontal, "Terminal Block Phoenix PT-1,5-2-5.0-H, 2 pins, pitch 5mm, size 10x9mm, drill diameter 1.3mm, pad diameter 2.6mm, http://www.mouser.com/ds/2/324/ItemDetail_1935161-922578.pdf", KiLib_Generator=terminal_block/Phoenix
J9 J10: library part JST_EH_B2B-EH-A_1x02_P2.50mm_Vertical, "JST EH series connector, B2B-EH-A (http://www.jst-mfg.com/product/pdf/eng/eEH.pdf)", Description="JST Connector  2 pins", KiLib_Generator=connector/JST, ki_fp_filters=Connector_JST:JST_EH_S2B-EH_1x02_P2.50mm_Horizontal
Q1: library part TO-92_Inline_Wide_CBE, "TO-92 leads in-line, wide, drill 0.75mm (see NXP sot054_po.pdf), Alternate KiCad Library", Datasheet=https://www.tme.eu/Document/6c5d898a533a0762c2bc33eb26c283a8/BC546-550-DTE.pdf, Description="NPN TO-92 transistor, 45V, 100mA, 500mW, Complementary to BC557, Alternate KiCAD Library"
R1 R2: library part R_Axial_DIN0207_L6.3mm_D2.5mm_P10.16mm_Horizontal, "Resistor, Axial_DIN0207 series, Axial, Horizontal, pin pitch=10.16mm, 0.25W = 1/4W, length*diameter=6.3*2.5mm^2, http://cdn-reichelt.de/documents/datenblatt/B400/1_4W%23YAG.pdf", Description="4.7kΩ, 1/4W Resistor", KiLib_Generator=resistor/THT, ki_fp_filters=Resistor_THT:R_Axial_DIN0207_L6.3mm_D2.5mm*
R4 R5 R6: library part R_Axial_DIN0204_L3.6mm_D1.6mm_P7.62mm_Horizontal, "Resistor, Axial_DIN0204 series, Axial, Horizontal, pin pitch=7.62mm, 0.167W, length*diameter=3.6*1.6mm^2, http://cdn-reichelt.de/documents/datenblatt/B400/1_4W%23YAG.pdf, Alternate KiCad Library", Description="THT 0204 Resistor, 7.62mm Pin Pitch, European Symbol, Alternate KiCad Library", ki_fp_filters=R_*
U1: library part XCVR_ESP32-S3-DEVKITC-1-N8R2, Package=None, MANUFACTURER=Espressif, MF="Espressif Systems", Description_1="WiFi Development Tools - 802.11 ESP32-S3 general-purpose development board, embeds ESP32-S3-WROOM-1-N8R2, with pin header", Price=None, Check_prices=https://www.snapeda.com/parts/ESP32-S3-DEVKITC-1-N8R2/Espressif+Systems/view-part/?ref=eda, STANDARD="Manufacturer Recommendations", PARTREV=V1, SnapEDA_Link=https://www.snapeda.com/parts/ESP32-S3-DEVKITC-1-N8R2/Espressif+Systems/view-part/?ref=snap, MP=ESP32-S3-DEVKITC-1-N8R2, Availability="In Stock"
U2 U3: library part MP1584-PowerDown-Modul
U4 U5: library part AD9833-Modul-Hochkant
U7: library part L9110_Dual_Motor_Module, "L9110_Dual_Motor_Module"

## Via types
v1: diameter 1.2, hole 0.8, F.Cu to B.Cu, tented both sides, 4 vias
v2: diameter 0.6, hole 0.3, F.Cu to B.Cu, tented both sides, 2 vias
v3: diameter 2, hole 0.8, F.Cu to B.Cu, tented both sides, 2 vias
v4: diameter 2, hole 0.6, F.Cu to B.Cu, tented both sides, 1 vias
v5: diameter 3, hole 0.8, F.Cu to B.Cu, tented both sides, 1 vias

## Nets (pads, with @x,y where several pads share a name; then routed paths per layer and width w, separated by ;. In a path a pad name is that pad's centre, name@x,y a point inside that pad or via, vN(x,y) a via of type N, cw(c..) or ccw(c..) an arc to the next point about the centre after c; other vN are vias at no path point)
pads on no net: C1.1 C1.2 C2.1 C2.2 C3.1 C3.2 C4.1 C4.2 J1.1 J1.2 J1.3 J1.4 J1.5 J1.6 J2.1 J2.2 J2.3 J3.1 J3.2 J3.3 J3.4 J3.5 J3.6 J3.7 J3.8 J3.9 J3.10 J4.1 J4.2 J5.1 J5.2 J6.1 J6.2 J6.3 J7.1 J7.2 J7.3 J8.1 J8.2 J9.1 J9.2 J10.1 J10.2 Q1.1 Q1.2 Q1.3 R1.1 R1.2 R2.1 R2.2 R4.1 R4.2 R5.1 R5.2 R6.1 R6.2 U1.J1_1 U1.J1_2 U1.J1_3 U1.J1_4 U1.J1_5 U1.J1_6 U1.J1_7 U1.J1_8 U1.J1_9 U1.J1_10 U1.J1_11 U1.J1_12 U1.J1_13 U1.J1_14 U1.J1_15 U1.J1_16 U1.J1_17 U1.J1_18 U1.J1_19 U1.J1_20 U1.J1_21 U1.J1_22 U1.J3_1 U1.J3_2 U1.J3_3 U1.J3_4 U1.J3_5 U1.J3_6 U1.J3_7 U1.J3_8 U1.J3_9 U1.J3_10 U1.J3_11 U1.J3_12 U1.J3_13 U1.J3_14 U1.J3_15 U1.J3_16 U1.J3_17 U1.J3_18 U1.J3_19 U1.J3_20 U1.J3_21 U1.J3_22 U2.1 U2.2 U2.3 U2.4 U2.5 U2.6 U2.7 U2.8 U3.1 U3.2 U3.3 U3.4 U3.5 U3.6 U3.7 U3.8 U4.1 U4.2 U4.3 U4.4 U4.5 U4.6 U4.7 U5.1 U5.2 U5.3 U5.4 U5.5 U5.6 U5.7 U7.1 U7.2 U7.3 U7.4 U7.5 U7.6
copper on no net: | length 1706.1
  F.Cu w1: v5(119.945,57.15) 122.485,59.69 122.485,64.77 125.025,67.31 136.455,67.31 v3(144.075,59.69) ; v3(155.505,23.495) 155.505,25.4 158.68,28.575 163.125,28.575 166.3,25.4 v2(166.3,20.955) ; v4(158.5,48.24) 156.5,48.24 155.5,49.24 155.5,57.24 157.95,59.69 159.315,59.69 ; v1(166.3,10.795) 168.205,12.7 168.205,27.94 171.38,31.115 171.38,42.545 172.015,43.18 173.92,43.18 ; 186.62,41.83 186.62,44.45
  B.Cu w1: 114.865,12.98 119.665,12.98 121.85,10.795 126.93,10.795 141.535,10.795 144.075,13.335 ; 114.865,15.48 111.45,15.48 ; 114.865,17.98 118.475,17.98 120.58,15.875 126.93,15.875 ; 114.865,20.48 119.15,20.48 121.215,18.415 126.93,18.415 ; 114.865,22.98 119.508,22.98 121.533,20.955 126.93,20.955 ; 114.865,25.48 119.865,25.48 121.85,23.495 126.93,23.495 ; 114.865,27.98 120.54,27.98 122.485,26.035 126.93,26.035 ; 114.865,30.48 121.215,30.48 123.12,28.575 126.93,28.575 ; 114.865,32.98 119.27,32.98 119.31,33.02 121.85,33.02 123.755,31.115 126.93,31.115 ; 114.865,35.48 122.565,35.48 124.39,33.655 126.93,33.655 ; 114.865,44.57 112.84,44.57 112.325,45.085 112.325,65.405 114.23,67.31 136.455,67.31 140.265,63.5 ; 114.865,47.07 117.325,47.07 118.675,45.72 118.675,41.91 121.85,38.735 126.93,38.735 ; 114.865,49.57 118.635,49.57 120.58,47.625 120.58,43.815 123.12,41.275 126.93,41.275 ; 114.865,52.07 119.945,52.07 123.12,48.895 126.93,48.895 ; 114.865,54.57 121.89,54.57 125.025,51.435 126.93,51.435 ; 115.52,63.835 115.52,60.345 114.865,59.69 114.865,57.07 119.865,57.07 v5(119.945,57.15) ; 118.02,63.835 120.88,63.835 122.485,62.23 122.485,57.785 123.755,56.515 126.93,56.515 ; 126.93,13.335 138.995,13.335 140.265,14.605 140.265,63.5 ; 143.44,76.835 141.535,76.835 133.915,69.215 112.96,69.215 110.42,66.675 110.42,16.51 111.45,15.48 ; 152.33,10.795 152.33,13.335 ; 152.33,15.875 161.22,15.875 ; 152.33,18.415 161.22,18.415 ; 152.33,20.955 161.22,20.955 ; 152.33,23.495 v3(155.505,23.495) ; 152.33,28.575 155.505,28.575 162.49,35.56 177.095,35.56 178.365,36.83 ; 152.33,41.275 153.965,41.275 156,39.24 156,36.12 ; 152.33,48.895 154.235,48.895 157.41,52.07 159.315,52.07 ; 152.33,51.435 154.235,51.435 157.41,54.61 159.315,54.61 ; 152.33,53.975 156.775,58.42 156.775,61.595 157.41,62.23 159.315,62.23 ; 152.33,56.515 154.87,59.055 154.87,62.865 156.775,64.77 159.315,64.77 ; 152.33,64.135 145.98,64.135 144.075,62.23 v3(144.075,59.69) 144.075,13.335 ; 152.965,26.035 156.14,26.035 163.76,33.655 185.35,33.655 186.62,34.925 186.62,36.83 ; 156,43.74 156,42.24 157,41.24 163,41.24 ; 158.5,36.12 160.38,36.12 161.5,37.24 166,37.24 167.5,38.74 167.5,39.24 ; 158.5,43.74 v4(158.5,48.24) ; 159.315,57.15 175.19,57.15 182.175,50.165 182.175,46.355 ; 161.12,10.795 v1(166.3,10.795) 171.38,10.795 ; 161.12,15.875 171.38,15.875 ; 161.12,18.415 171.38,18.415 ; 161.12,23.495 171.38,23.495 173.92,23.495 178.365,19.05 181.54,19.05 ; 161.22,10.795 156.775,10.795 154.235,8.255 111.69,8.255 110.42,9.525 110.42,14.45 111.45,15.48 ; 161.22,26.035 163.76,26.035 165.03,27.305 165.03,29.21 166.935,31.115 ; 163,38.7 163.46,38.7 166.5,41.74 167.5,41.74 ; 163,43.78 163,45.74 163.615,46.355 182.175,46.355 ; 163.76,76.517 161.538,76.517 153.6,68.58 145.345,68.58 140.265,63.5 ; v2(166.3,20.955) 171.38,20.955 ; 167.55,39.37 167.57,39.39 ; 171.38,26.035 177.095,26.035 ; 173.92,43.18 175.27,41.83 178.365,41.83 ; 177.095,15.875 178.365,14.605 181.54,14.605 184.715,14.605 186.62,16.51 ; 177.095,31.115 180.27,31.115 181.54,29.845 181.54,23.455 184.675,23.455 186.62,21.51 ; 178.365,39.33 182.135,39.33 182.175,39.37 ; 181.54,17.105 181.54,19.05 ; 181.54,20.955 181.54,19.05 ; 186.62,19.01 181.58,19.01 181.54,19.05 ; 144.075,13.335 145.98,13.335 149.79,13.335 161.12,13.335 171.38,13.335 174.555,13.335 177.73,10.16 187.89,10.16 190.43,12.7 190.43,38.735 189.795,39.37 189.755,39.33 186.62,39.33 182.215,39.33 182.175,39.37 ; 182.175,39.37 182.175,46.355
  B.Cu w1.5: 117.405,74.375 119.865,74.375 119.945,74.295 123.755,78.105 123.755,81.28 125.025,82.55 125.083,82.492 128.835,82.492 ; 117.405,79.375 117.405,85.725 ; 128.835,78.992 128.835,78.74 121.85,71.755 114.23,71.755 112.325,73.66 112.325,88.265 114.785,90.725 117.405,90.725 117.405,90.808 120.58,93.983 131.415,93.983 131.415,97.195 133.28,99.06 139.63,99.06 143.44,95.25 ; 136.415,93.983 136.415,82.57 137.09,81.895 ; 143.44,76.835 145.98,76.835 ; 159.315,59.69 166.935,59.69 168.84,61.595 ; 163.76,76.517 166.3,76.517 167.888,76.517 168.84,75.565 168.84,61.595 ; 186.62,41.83 186.62,50.165 177.095,59.69 170.745,59.69 168.84,61.595
  B.Cu w2: 128.835,78.992 136.687,78.992 137.09,79.395 ; 143.44,95.25 145.98,95.25 145.98,97.79 147.25,99.06 162.49,99.06 163.76,97.79 163.76,94.932 166.3,94.932
  Edge.Cuts w0.254: 190.43,102.235 cw(c190.43,100.965) 191.7,100.965 ; 190.43,102.235 cw(c190.43,100.965) 191.7,100.965 ; 190.43,102.235 110.42,102.235 ccw(c110.42,100.965) 109.15,100.965 109.15,1.905 ccw(c111.055,1.905) 111.055,0 189.795,0 ccw(c189.795,1.905) 191.7,1.905 191.7,100.965
  other v1: 166.3,10.795 166.3,10.795 166.3,20.955
  other v2: 166.3,20.955

## Polygon pours and split planes (outlines as drawn)
no net on F.Cu "F.Cu-" (solid, remove dead copper, pour order 30075): 122.063,58.561 121.356,59.268 120.026,58.645 119.941,57.146 121.44,57.231
no net on F.Cu "F.Cu--1" (solid, remove dead copper, pour order 30076): 157.215,59.662 157.922,58.955 157.95,59.19 158.163,59.07 159.316,59.69 158.163,60.31 157.95,60.19 157.596,60.044
no net on F.Cu "F.Cu--2" (solid, remove dead copper, pour order 30078): 143.018,61.454 142.311,60.747 143.193,59.219 144.079,59.686 144.546,60.572
no net on F.Cu "F.Cu--3" (solid, remove dead copper, pour order 30080): 155.922,25.11 155.215,25.817 155.151,25.754 155.005,25.4 154.548,23.785 155.505,23.489 156.462,23.785 156.005,25.4 155.859,25.046
no net on B.Cu "B.Cu--30" (solid, remove dead copper, pour order 30067): 123.755,80.645 123.755,86.36 123.755,91.44 129.47,91.44 148.52,91.44 148.52,97.155 155.505,97.155 155.505,73.025 147.885,73.025 147.885,81.28
no net on B.Cu "B.Cu--20" (solid, remove dead copper, pour order 30068): 155.505,75.565 158.68,75.565 161.855,78.74 155.505,78.74
no net on B.Cu "B.Cu--4" (solid, remove dead copper, pour order 30069): 170.11,78.74 171.38,76.835 171.38,62.865 172.65,61.595 178.365,61.595 189.16,50.8 189.16,38.1 191.7,38.1 191.7,102.235 168.84,102.235 168.84,78.74
no net on B.Cu "B.Cu--5" (solid, remove dead copper, pour order 30070): 189.16,38.1 185.985,38.1 185.985,40.164 189.16,40.164
no net on B.Cu "B.Cu--12" (solid, remove dead copper, pour order 30071): 155.505,73.025 158.68,75.565 155.505,75.565
no net on B.Cu "B.Cu--3" (solid, remove dead copper, pour order 30072): 142.17,77.335 142.17,76.335 142.805,76.2 143.441,76.835 142.805,77.47
no net on B.Cu "B.Cu--7" (solid, remove dead copper, pour order 30073): 157.41,65.27 157.41,64.27 158.236,64.135 159.316,64.77 158.236,65.405
no net on B.Cu "B.Cu--15" (solid, remove dead copper, pour order 30074): 162.49,77.018 162.49,76.018 163.125,75.882 163.761,76.517 163.125,77.153
no net on B.Cu "B.Cu--17" (solid, remove dead copper, pour order 30077): 157.41,55.11 157.41,54.11 158.236,53.975 159.316,54.61 158.236,55.245
no net on B.Cu "B.Cu--25" (solid, remove dead copper, pour order 30079): 157.41,52.57 157.41,51.57 158.236,51.435 159.316,52.07 158.236,52.705
no net on B.Cu "B.Cu--19" (solid, remove dead copper, pour order 30081): 117.45,57.57 117.45,56.57 118.91,56.07 119.951,57.07 118.765,58.07
no net on B.Cu "B.Cu--31" (solid, remove dead copper, pour order 30082): 157.41,62.73 157.41,61.73 158.236,61.595 159.316,62.23 158.236,62.865
no net on B.Cu "B.Cu--34" (solid, remove dead copper, pour order 30083): 161.22,56.65 161.22,57.65 160.395,57.785 159.314,57.15 160.395,56.515
no net on B.Cu "B.Cu--29" (solid, remove dead copper, pour order 30084): 153.51,23.995 153.51,22.995 155.215,22.538 155.511,23.495 155.215,24.452
no net on B.Cu "B.Cu--27" (solid, remove dead copper, pour order 30085): 143.575,57.695 144.575,57.695 145.032,59.4 144.075,59.696 143.118,59.4
no net on B.Cu "B.Cu--36" (solid, remove dead copper, pour order 30086): 144.575,61.685 143.575,61.685 143.118,59.98 144.075,59.684 145.032,59.98
no net on B.Cu "B.Cu--14" (solid, remove dead copper, pour order 30087): 159.633,13.835 159.633,12.835 160.458,12.7 161.221,13.335 160.458,13.97
no net on B.Cu "B.Cu--35" (solid, remove dead copper, pour order 30088): 169.793,23.995 169.793,22.995 170.618,22.86 171.381,23.495 170.618,24.13
no net on B.Cu "B.Cu--13" (solid, remove dead copper, pour order 30089): 159.633,11.295 159.633,10.295 160.458,10.16 161.221,10.795 160.458,11.43
no net on B.Cu "B.Cu--16" (solid, remove dead copper, pour order 30090): 162.808,22.995 162.808,23.995 161.982,24.13 161.219,23.495 161.982,22.86
no net on B.Cu "B.Cu--22" (solid, remove dead copper, pour order 30091): 169.793,21.455 169.793,20.455 170.618,20.32 171.381,20.955 170.618,21.59
no net on B.Cu "B.Cu--28" (solid, remove dead copper, pour order 30092): 172.968,12.835 172.968,13.835 172.142,13.97 171.379,13.335 172.142,12.7
no net on B.Cu "B.Cu--21" (solid, remove dead copper, pour order 30093): 169.793,13.835 169.793,12.835 170.618,12.7 171.381,13.335 170.618,13.97
no net on B.Cu "B.Cu--2" (solid, remove dead copper, pour order 30094): 162.808,15.375 162.808,16.375 161.982,16.51 161.219,15.875 161.982,15.24
no net on B.Cu "B.Cu--6" (solid, remove dead copper, pour order 30095): 159.633,21.455 159.633,20.455 160.458,20.32 161.221,20.955 160.458,21.59
no net on B.Cu "B.Cu--18" (solid, remove dead copper, pour order 30096): 172.968,22.995 172.968,23.995 172.142,24.13 171.379,23.495 172.142,22.86
no net on B.Cu "B.Cu--24" (solid, remove dead copper, pour order 30097): 162.808,17.915 162.808,18.915 161.982,19.05 161.219,18.415 161.982,17.78
no net on B.Cu "B.Cu--1" (solid, remove dead copper, pour order 30098): 162.808,12.835 162.808,13.835 161.982,13.97 161.219,13.335 161.982,12.7
no net on B.Cu "B.Cu--33" (solid, remove dead copper, pour order 30099): 169.793,11.295 169.793,10.295 170.618,10.16 171.381,10.795 170.618,11.43
no net on B.Cu "B.Cu--23" (solid, remove dead copper, pour order 30100): 162.808,10.295 162.808,11.295 161.982,11.43 161.219,10.795 161.982,10.16
no net on B.Cu "B.Cu--26" (solid, remove dead copper, pour order 30101): 169.793,18.915 169.793,17.915 170.618,17.78 171.381,18.415 170.618,19.05
no net on B.Cu "B.Cu--10" (solid, remove dead copper, pour order 30102): 172.968,25.535 172.968,26.535 172.142,26.67 171.379,26.035 172.142,25.4
no net on B.Cu "B.Cu-" (solid, remove dead copper, pour order 30103): 159.633,18.915 159.633,17.915 160.458,17.78 161.221,18.415 160.458,19.05
no net on B.Cu "B.Cu--11" (solid, remove dead copper, pour order 30104): 159.633,16.375 159.633,15.375 160.458,15.24 161.221,15.875 160.458,16.51
no net on B.Cu "B.Cu--8" (solid, remove dead copper, pour order 30105): 169.793,16.375 169.793,15.375 170.618,15.24 171.381,15.875 170.618,16.51
no net on B.Cu "B.Cu--9" (solid, remove dead copper, pour order 30106): 162.808,25.535 162.808,26.535 161.982,26.67 161.219,26.035 161.982,25.4
no net on B.Cu "B.Cu--32" (solid, remove dead copper, pour order 30107): 179,96.52 179,78.74 155.505,78.74 155.505,97.155 161.22,97.155 161.22,92.71 172.65,92.71 172.65,96.52

## Other copper
B.Cu:
  text "Ver 1.1" at 165.03,4.03 h1.5
  text "VINYL-Player" at 181.24,3.78 h1.5
  text "(C) Andre Reichl 03/2026" at 181.24,0.462 h1.5
F.SilkS:
  text "Power Amp" at 130.005,99.563 h1
  text "Regler 3,3V" at 145.88,97.658 h1
  text "Regler 5V" at 166.835,97.658 h1
  text "GND 12V" at 136.99,88.3 h1
  text "Switch" at 111.679,86.26 h1 r90
  text "12V GND" at 123.085,79.91 h1 r90
  text "Power" at 111.655,74.83 h1 r90
  text "OTA" at 112.225,66.075 h1
  text "Lift-Motor" at 191.054,55.145 h1 r90
  text "Hall-IC" at 174.455,44.485 h1
  text "Taster-LED" at 171.345,36.73 h1 r90
  text "Bedienpanel" at 112.48,36.095 h1 r90
  text "LED-Ring" at 184.235,35.46 h1 r90
  text "Sig GND VCC" at 182.33,34.19 h1 r90
  text "Sig GND VCC" at 191.22,34.19 h1 r90
  text "Sig1 GND Sig2" at 191.22,13.235 h1 r90
  text "3V3" at 154.77,9.56 h1
  text "3V3" at 165.565,9.56 h1
  text "Amp" at 191.197,9.425 h1 r90
  text "USB-Buchsen" at 127.065,2.945 h2
  text "Ver: 1.1" at 175.09,2.575 h1
  text "VINYL-Player / (C) Andre Reichl 03/2026" at 154,1.427 h1

## Text inside footprints (layer, text, board x,y; h text height)
Q1: F.SilkS "E" at 162.076,43.732 h0.9 r90; F.SilkS "B" at 162.076,40.79 h0.9 r90; F.SilkS "C" at 162.076,37.848 h0.9 r90